# Altium PCB PCB.PcbDoc (part 2 of 2)
Units mil, origin at the board's own origin, x right, y up, seen from the top; angles counter-clockwise.
Board outline 1030 x 1437.5 mil, 4 copper layers (Top Layer, Layer 1, Layer 2, Bottom Layer), stack 23.756 mil thick; 67 components, 63 nets, 297 pads, 88 vias.
Unrouted connection lines stored in the file: 37.
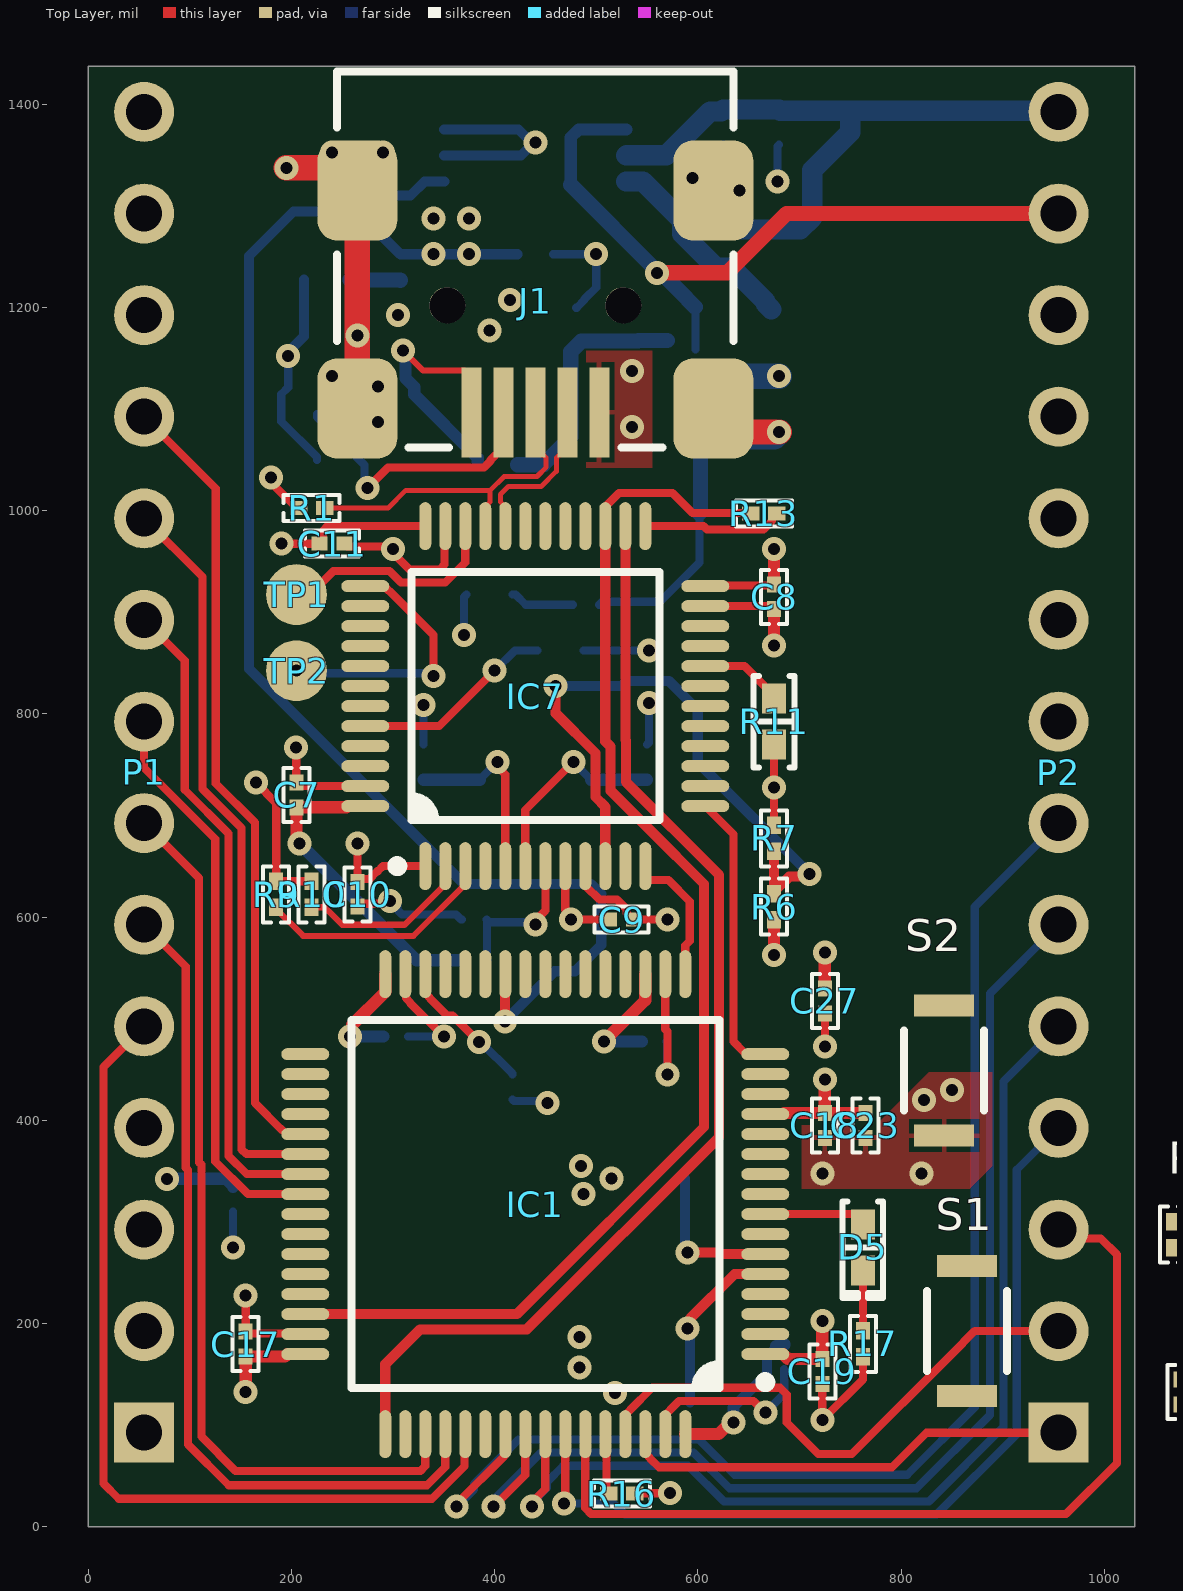
[diagram p0: Top Layer view]

## Via types
v1: diameter 23.62, hole 11.81, Top Layer to Bottom Layer, 88 vias

## Nets (pads, with @x,y where several pads share a name; then routed paths per layer and width w, separated by ;. In a path a pad name is that pad's centre, name@x,y a point inside that pad or via, vN(x,y) a via of type N, cw(c..) or ccw(c..) an arc to the next point about the centre after c; other vN are vias at no path point) (continued)
GND: (continued)
  Top Layer w6: J1.S@264.8,1100.61 J1.S@264.8,1109.07 ; J1.S@264.8,1315.18 237.32,1315.18 236.16,1316.34 272.32,1352.5 v1(290,1352.5) ; v1(310,1157.5) 329.34,1138.16 370.17,1138.16 377.01,1131.32 J1.5 ; J1.S@615.2,1315.18 v1(641.22,1315.18)
  Top Layer w8: v1(155,227.5) C17.1 156.63,190.28 212.89,190.28 IC1.47 ; v1(165,732.5) 185,712.5 R9.2 R10.1 ; v1(204.58,767.08) 204.79,766.87 204.79,732.71 C7.1 ; C7.1@207.89,728.92 IC7.47 ; C11.1 255.09,964.61 297.89,964.61 v1(300,962.5) ; C10.1 267.81,613.11 294.05,613.11 v1(296.86,615.92) ; v1@300,958.27 316.02,942.25 346,942.25 350.69,946.94 350.69,984.09 IC7.35 ; IC1.31 312.78,543.15 312.78,520.31 316.83,516.26 316.83,515.67 v1(350,482.5) ; IC7.8 469.53,607.2 475,601.73 v1(475,597.5) C9.1 ; R16.1 538.5,32.91 572.09,32.91 v1(572.5,33.31) ; IC1.63 567.95,109.87 572.73,114.65 572.73,115.01 581.46,123.74 654.91,123.74 666.16,112.5 v1(666.69,112.5) ; IC1.18 567.95,489.7 570,487.65 v1(570,445) ; IC7.23 672.11,906.08 675,903.19 C8.1 ; IC1.12 IC1.12@685.13,386.4 ; R7.1 v1(675,727.5) R11.1 ; C19.1@722.5,141.57 C19.1 v1(722.5,105) 762.5,145 R17.2 ; C18.1 C18.1@727.5,380.3 ; v1(725,472.5) C27.1@725,505.59
  Top Layer w12: v1(675,867.5) C8.1
  Top Layer w25: v1(195,1337.5) 242.48,1337.5 264.8,1315.18 J1.S@264.8,1109.07 ; J1.S@632.09,1117.5 615.2,1100.61 638.31,1077.5 v1(680,1077.5)
  Bottom Layer w8: v1(142.5,275) C24.1 ; v1(196.81,1152.5) 196.81,1121.45 190,1114.64 190,1087.82 225,1052.82 R2.1 ; v1@304.22,613.28 304.22,607.19 308.91,602.5 361.81,602.5 366.81,597.5 C12.1 ; C21.1 v1(350,482.5) ; C13.1 v1(330,808.78) ; v1(370,877.5) 370,915.14 D1.2 ; IC2.2@383.43,1046.83 IC2.2 ; C26.2 419.16,418.93 450.6,418.93 v1(452.26,417.26) ; C6.1 v1(500,1252.5) 500,1219.82 488.6,1208.42 488.6,1207.63 480.79,1199.82 C5.1 ; R8.1 v1(551.81,862.5) ; C14.1 551.81,771.63 v1(551.81,810.69) ; C20.1@569.7,477.8 C20.1 569.7,477.2 569.7,445.3 v1(570,445) ; C2.1 625.79,1360.18 633.6,1352.37 633.6,1327.03 641.22,1319.4 v1(641.22,1315.18) ; v1(666.69,112.5) 685,130.81 C22.1 ; v1(678.54,1323.96) 678.54,1358.72 C1.1
  Bottom Layer w10: v1(196.81,1152.5) 196.81,1156.19 212.36,1171.74 D2.2 ; IC6.2 425.99,1349.7 v1@438.78,1362.5 ; IC6.3 423.52,1375.3 436.31,1362.5 v1@438.78,1362.5 ; v1(440,1362.5) v1@438.78,1362.5
  Bottom Layer w12: v1(310,1157.5) 312.22,1155.28 312.22,1130.3 320.83,1121.69 320.83,1114.34 383.43,1051.75 IC2.2@383.43,1046.83
  Bottom Layer w25: C4.1 637.42,1072.6 675.1,1072.6 v1(680,1077.5) ; C3.1 v1(680,1132.5)
  other v1: 518.33,131.67 483.33,156.67 483.33,186.67 487.5,327.5 515,342.5 722.5,347.5 820,347.5 485,355 822.5,420 850,430 285,1087.5 285,1122.5 240,1132.5 265,1172.5 595,1327.5 240,1352.5
GPIO1: IC1.11 P1.14
GPIO2: IC1.24 P1.13
GPIO3: IC1.25 P1.12
GPIO4: IC1.37 P1.11 | length 783
  Top Layer w8: P1.11 125.5,1022 125.5,731.64 164,693.14 164,416.91 189.73,391.18 190.09,391.18 194.87,386.4 IC1.37
GPIO5: IC1.38 P1.10 | length 725.4
  Top Layer w8: P1.10 112.5,935 112.5,726.26 151,687.76 151,371.4 155.69,366.71 IC1.38
GPIO6: IC1.39 P1.9 | length 644.9
  Top Layer w8: P1.9 95,852.5 95,725.37 138,682.37 138,365.01 155.99,347.03 IC1.39
GPIO7: IC1.40 P1.8 | length 563.9
  Top Layer w8: P1.8 55,746.99 125,676.99 125,359.63 157.29,327.34 IC1.40
GPIO8: IC1.51 P1.7 | length 894.9
  Top Layer w8: P1.7 109,638.5 109,358.66 111.31,356.35 111.31,88.69 145,55 327.05,55 331.73,59.69 IC1.51
GPIO9: IC1.52 P1.6 | length 839
  Top Layer w8: P1.6 96,551.5 96,353.28 98.31,350.97 98.31,80.81 138.31,40.81 333.31,40.81 351.42,58.92 IC1.52
GPIO10: IC1.53 P1.5 | length 873.3
  Top Layer w8: P1.5 15,452.5 15,42.5 30,27.5 338.38,27.5 370.37,59.49 370.37,90.39 IC1.53
GPIO11: IC1.27 P2.9
GPIO12: IC1.28 P2.8
GPIO13: IC1.55 P2.7 | length 1282.9
  Top Layer w8: v1(362.62,19.68) 362.62,22.62 409.74,69.74 409.74,90.39 IC1.55
  Bottom Layer w8: v1(362.62,19.68) 379.57,36.63 379.57,42.07 423.5,86 601.27,86 636.13,51.13 806.13,51.13 872.5,117.5 872.5,610 P2.7
GPIO14: IC1.56 P2.6 | length 1153.9
  Top Layer w8: v1(398.88,19.68) 430.16,50.96 IC1.56
  Bottom Layer w8: v1(398.88,19.68) 398.88,23.91 402.5,27.53 402.5,30 445.5,73 595.88,73 631.01,37.87 815.37,37.87 887.5,110 887.5,525 P2.6
GPIO15: IC1.57 P2.5 | length 1024.9
  Top Layer w8: v1(436.62,19.68) 436.62,23.91 449.84,37.14 IC1.57
  Bottom Layer w8: v1(436.62,19.68) 436.62,23.46 451.57,38.41 451.57,44.07 467.5,60 590.5,60 625.63,24.87 827.37,24.87 900.87,98.37 900.87,438.37 P2.5
GPIO16: IC1.58 P2.4 | length 870.6
  Top Layer w8: v1(468.13,22.93) 469.53,24.33 IC1.58
  Bottom Layer w8: v1(468.13,22.93) 517.25,22.93 528.3,11.87 835,11.87 913.87,90.74 913.87,351.37 P2.4
GPIO17: IC1.59 P2.3 | length 892.3
  Top Layer w8: IC1.59 489.21,18.29 495,12.5 962.5,12.5 1012.5,62.5 1012.5,267.81 996.53,283.79 963.71,283.79 P2.3
GPIO18: IC1.61 P2.2 | length 549.8
  Top Layer w8: IC1.61 528.58,109.87 533.36,114.65 533.36,115.01 555.09,136.74 680.76,136.74 687.5,130 687.5,102.5 718.5,71.5 751.5,71.5 850,170 872.5,192.5 P2.2
GPIO19: IC1.62 P2.1 | length 445.5
  Top Layer w8: IC1.62 548.27,72.37 553.05,67.59 553.05,67.23 561.78,58.5 791,58.5 825,92.5 P2.1
ID: J1.4 R2.2 | length 278.4
  Top Layer w8: v1(275,1022.5) 295,1042.5 389.5,1042.5 395.85,1048.85 395.85,1049.77 408.5,1062.42 J1.4
  Bottom Layer w8: R2.2 225,1092.18 272.01,1045.17 272.01,1025.49 v1(275,1022.5)
NetC26_1: C26.1 IC1.30 | length 138.5
  Top Layer w8: IC1.30 331.73,525.13 336.51,520.35 336.51,519.99 353.19,503.31 358.72,503.31 v1(384.76,477.26)
  Bottom Layer w8: v1(384.76,477.26) 386.22,477.26 417.5,445.98 C26.1
NetD1_1: D1.1 R4.1 | length 63.7
  Bottom Layer w8: D1.1 420.59,917.5 430.59,907.5 R4.1
NetD2_1: D2.1 R5.1 | length 49.8
  Bottom Layer w15: D2.1 257.93,1227.2 306.91,1227.2 R5.1
NetD5_2: D5.2 R17.1 | length 59.6
  Top Layer w8: R17.1 D5.2
NetFB1_1: FB1.1 J1.1
  other v1: 535,1082.5 535,1137.5
NetIC1_60: IC1.60 R16.2 | length 60.1
  Top Layer w8: IC1.60 508.9,72.37 510,71.27 510,35 R16.2
NetIC7_10: IC7.10 R6.1 R7.2 | length 642.4
  Top Layer w10: v1(460,827.5) 460.06,827.44 460.06,800.69 499.21,761.53 499.21,718.23 508.9,708.54 IC7.10 ; R6.1 R6.1@675,624.86 ; R7.2 R6.1@675,624.86 ; v1(710,642.5) 707.39,639.89 690.03,639.89 R6.1@675,624.86
  Bottom Layer w10: v1(460,827.5) 525,827.5 530,832.5 571.38,832.5 600,803.88 600,752.5 v1(710,642.5)
NRST_n: C25.2 IC1.7 S1.2
OSC_IN: C16.2 IC1.5 Y2.1 | length 176.4
  Top Layer w10: v1(590,195.1) 592.61,197.7 592.61,205.11 636.1,248.6 IC1.5
  Bottom Layer w10: v1(590,195.1) 592.32,192.78 C16.2
OSC_OUT: C15.2 IC1.6 Y2.2 | length 150.8
  Top Layer w10: v1(590,269.9) 621.42,269.9 623.04,268.29 IC1.6
  Bottom Layer w10: C15.2 587.32,272.58 v1(590,269.9)
PC13: IC7.2 R10.2 | length 172.8
  Top Layer w6: R10.2 232.8,609.7 250,592.5 311.46,592.5 351.42,632.46 IC7.2
PC14: IC7.3 R9.1 | length 237.6
  Top Layer w6: R9.1 185,607.93 211.43,581.5 320.14,581.5 371.1,632.46 IC7.3
PSTAT: IC1.26 IC6.1 R3.1 | length 1291.4
  Top Layer w10: v1(410,497.5) 410.24,497.74 410.24,543.64 IC1.26
  Bottom Layer w10: IC6.1 331.08,1324.11 317.26,1310.3 R3.1 275,1308.52 273.11,1306.63 257.3,1306.63 245.2,1294.53 202.03,1294.53 158.19,1250.69 158.19,844.31 370,632.5 495,632.5 505,622.5 505,572.5 479.23,546.73 459.23,546.73 v1(410,497.5)
ST_JTCK: IC7.37 TP2.1 | length 264.4
  Top Layer w8: IC7.37 291.43,925.77 296.2,920.99 296.57,920.99 340,877.56 v1(340,837.5)
  Bottom Layer w8: v1(205,842.5) 207.5,840 337.5,840 v1(340,837.5)
ST_JTMS: IC7.34 TP1.1 | length 224.5
  Top Layer w8: TP1.1 218.05,917.5 241.22,940.67 296.57,940.67 307.99,929.25 351.39,929.25 371.1,948.96 IC7.34
STATUS_LED: D5.1 IC1.8 | length 101.6
  Top Layer w8: IC1.8 754.69,307.66 762.5,299.85 D5.1
T_JTCK: IC1.49 IC7.26 | length 1129.6
  Top Layer w10: IC1.49 292.36,159.86 326.73,194.23 431.73,194.23 621,383.5 621,641.5 529.21,733.29 529.21,773.96 528.93,774.24 528.93,984.48 IC7.26
T_JTMS: IC1.46 IC7.27 R13.1 | length 1276.5
  Top Layer w8: IC7.27 509.63,985.55 509.63,1004.66 522.41,1017.44 575,1017.44 594.63,997.82 651.88,997.82 R13.1
  Top Layer w10: IC1.46 421.73,209.23 606,393.5 606,632.66 552.66,685.99 514.21,724.44 514.21,767.75 508.9,773.06 IC7.27
T_SWDIO_IN: IC7.25 R13.2 | length 140.1
  Top Layer w8: IC7.25 605.7,984.82 608.92,981.61 664.59,981.61 673.13,990.15 673.13,994.61 676.02,997.5 R13.2
UART_RX: IC1.16 IC7.13 | length 279.7
  Top Layer w8: IC7.13 635,681.56 635,477.5 645.46,467.04 645.72,467.04 647.63,465.14 IC1.16
UART_TX: IC1.17 IC7.12 | length 138.5
  Top Layer w8: IC7.12 548.27,638.22 550.03,636.46 571.04,636.46 592,615.5 592,576.44 587.64,572.08 IC1.17
USB_D_N: IC7.32 J1.2 | length 160.6
  Top Layer w5: IC7.32 410.47,1004.03 405.63,1008.87 405.63,1015.94 413.49,1023.8 445.82,1023.8 460.75,1038.74 460.75,1052.15 463.68,1055.08 464.15,1055.08 471.5,1062.42 J1.2
USB_D_P: IC7.33 J1.3 R1.1 | length 330.7
  Top Layer w5: R1.1 295,1002.5 312.59,1020.09 395.63,1020.09 ; IC7.33 390.79,1004.03 395.63,1008.87 395.63,1020.09 ; J1.3 440,1062.42 447.34,1055.08 447.82,1055.08 450.75,1052.15 450.75,1042.88 441.68,1033.8 409.35,1033.8 395.63,1020.09
VCC3V3: C6.2 C7.2 C8.2 C9.2 C10.2 C11.2 C17.2 C18.2 C19.2 C20.2 C21.2 C22.2 C23.2 C24.2 C27.2 C28.2 C30.2 IC1.1 IC1.13 IC1.19 IC1.32 IC1.48 IC1.64 IC2.5 IC3.5 IC4.5 IC7.1 IC7.9 IC7.24 IC7.36 IC7.48 P2.12 R1.2 R3.2 R5.2 R6.2 R12.2 | length 1845.1
  Top Layer w8: v1(180,1032.5) 182.99,1029.51 182.99,1024.94 205.43,1002.5 R1.2 ; v1(190,967.5) 228,967.5 230.89,970.39 230.89,980.14 235.58,984.82 IC7.36 ; v1(265,672.5) 265,637.5 276.81,637.5 284.5,645.19 284.94,645.19 290.08,650.33 329.97,650.33 330.12,650.18 IC7.1 ; IC7.9 489.94,649.45 489.94,630.34 503.08,617.2 520.58,617.2 529.67,608.12 529.67,604.05 536.22,597.5 C9.2 v1(570,597.5) ; IC7.24 608.05,926.5 674,926.5 C8.2
  Top Layer w12: v1(155,132.5) C17.2 193.73,167.5 196.09,169.86 IC1.48 ; v1(208.02,672.5) 208.02,675.64 205,678.66 C7.2 254.01,708.09 255.15,709.23 IC7.48 ; v1(257.5,482.5) 259.72,484.72 259.72,493.71 292.36,526.35 IC1.32 ; v1(395,1177.5) v1@398.14,1177.5 ; v1(507.5,477.5) 548.17,518.17 548.17,543.78 IC1.19 ; IC1.64 620.48,91.12 631.86,102.5 v1(635,102.5) ; IC1.1 683.91,169.86 688.77,165 C19.2 v1(722.5,202.5) ; IC1.13 683.91,406.08 685.03,407.2 C18.2 ; v1(675,562.5) R6.2 ; C8.2 v1(675,962.5) ; v1(725,440) C18.2 ; C27.2@725,530 v1(725,565) ; C23.2 C18.2
  Bottom Layer w10: R3.2 275,1282.93 276.89,1281.04 278.66,1281.04 R5.2 v1(340,1252.5) v1(375,1252.5) C6.2 ; 635,117.5 668.11,150.61 668.11,167.31 677.22,176.42 677.22,177.83
  Bottom Layer w12: v1(77.36,342.48) 135.69,342.5 142.5,335.69 C24.2 ; v1(208.02,672.5) 323.02,557.5 R12.2 ; v1(257.5,482.5) C21.2 ; v1(507.5,477.5) C20.2 ; v1(635,102.5) 635,117.5 ; 677.22,177.83 684.11,177.83 685,178.72 C22.2
  other v1: 305,1192.5 415,1207.5 340,1287.5 375,1287.5
VCC5V: C3.2 C4.2 C5.2 C29.2 C31.2 FB1.2 IC2.1 IC2.3 IC3.3 IC4.3 IC5.2 IC6.6 P2.13 R4.2 | length 1226.7
  Top Layer w15: v1(560,1234.11) 628.86,1234.11 687.25,1292.5 P2.13
  Bottom Layer w8: R4.2 505.69,910.39 562.89,910.39 601.5,949 FB1.2 ; v1(560,1234.11) v1@560,1235.73 ; 597.6,1158.78 IC5.2@597.6,1200.63
  Bottom Layer w12: 475,1320.73 475,1367.5 482.8,1375.3 IC6.6
  Bottom Layer w15: IC2.1 447.76,1045.26 475,1072.5 475,1156.75 485.37,1167.13 541.14,1167.13 541.51,1167.5 570,1167.5 ; 475,1320.73 v1@560,1235.73 ; v1(560,1234.11) 561.65,1232.46 565.76,1232.46 589.35,1208.88 589.35,1208.35 597.07,1200.63 IC5.2@597.6,1200.63 ; FB1.2 602.68,998.68 C4.2
VIN: C1.2 C2.2 IC5.3 IC6.7 P2.14 | length 648.5
  Bottom Layer w8: C1.2 C1.2@681.16,1393.66 ; 748.84,1393.66 750,1392.5
  Bottom Layer w20: IC6.7 529.72,1349.86 569.06,1349.86 612.21,1393.01 623.19,1393.01 C2.2 C1.2 ; IC5.3 700.78,1276.87 712.5,1288.59 712.5,1335 750,1372.5 750,1392.5 ; C1.2@681.16,1393.66 748.84,1393.66 953.84,1393.66 P2.14
pads on no net: IC1.2 IC1.3 IC1.4 IC1.14 IC1.15 IC1.20 IC1.21 IC1.22 IC1.23 IC1.29 IC1.35 IC1.36 IC1.41 IC1.42 IC1.43 IC1.50 IC1.54 IC2.4 IC3.9 IC4.9 IC6.4 IC6.5 IC7.4 IC7.11 IC7.14 IC7.15 IC7.16 IC7.17 IC7.18 IC7.19 IC7.21 IC7.22 IC7.28 IC7.29 IC7.30 IC7.31 IC7.38 IC7.39 IC7.40 IC7.41 IC7.42 IC7.43 IC7.45 IC7.46 J1.M

## Polygon pours and split planes (outlines as drawn)
GND on Layer 1 "GND_PLANE" (solid, pour order 0): -67.5,1462.5 -67.5,-32.5 1122.5,-32.5 1122.5,1462.5
GND on Bottom Layer "GND_L04_P012" (solid, pour order 12): 570,372.5 570,315 500,315 500,147.5 575,147.5 575,95 467.5,95 467.5,372.5
VCC5V on Bottom Layer "NONET_L-01_P-001" (solid, pour order 7): 470,1067.5 405,1067.5 405,1022.5 365,1022.5 365,1067.5 320,1067.5 320,992.5 470,992.5
VCC3V3 on Bottom Layer "NONET_L-01_P-001" (solid, pour order 8): 435,1302.5 435,1102.5 320,1102.5 265,1157.5 265,1302.5
VCC5V on Bottom Layer "NONET_L-01_P-001" (solid, pour order 6): 620,1217.5 620,1047.5 565,1047.5 565,1217.5
NetFB1_1 on Bottom Layer "NONET_L-01_P-001" (solid, pour order 4): 560,1142.5 560,952.5 495,952.5 495,1122.5 525,1152.5 550,1152.5
GND on Top Layer "GND_L01_P013" (solid, pour order 13): 702.5,395 702.5,372.5 702.5,332.5 867.5,332.5 890,355 890,447.5 827.5,447.5 775,395
NetFB1_1 on Top Layer "NONET_L-01_P-001" (solid, pour order 3): 490,1157.5 490,1042.5 555,1042.5 555,1157.5
VCC3V3 on Layer 2 "NONET_L-01_P-001" (solid, pour order 11): 1160,1462.5 1160,-2.5 10,-2.5 5,-7.5 5,1462.5